# Altium PCB uChord Logic.PcbDoc (part 1 of 2)
Units mm, origin at the board's own origin, x right, y up, seen from the top; angles counter-clockwise.
Board outline 285 x 95.88 mm, 2 copper layers (Top Layer, Bottom Layer), stack 1.577 mm thick; 120 components, 85 nets, 515 pads, 29 vias.
Unrouted connection lines stored in the file: 54.
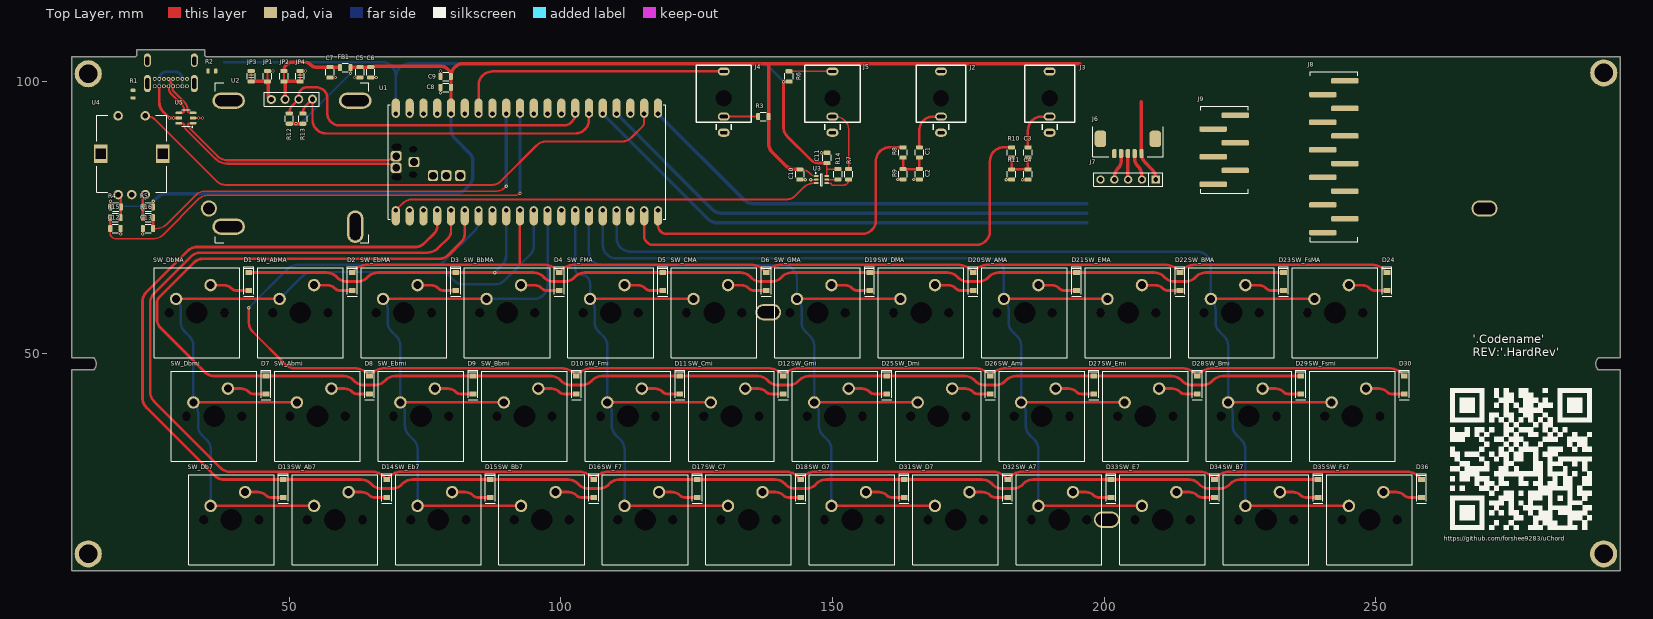
[diagram p0: Top Layer view]
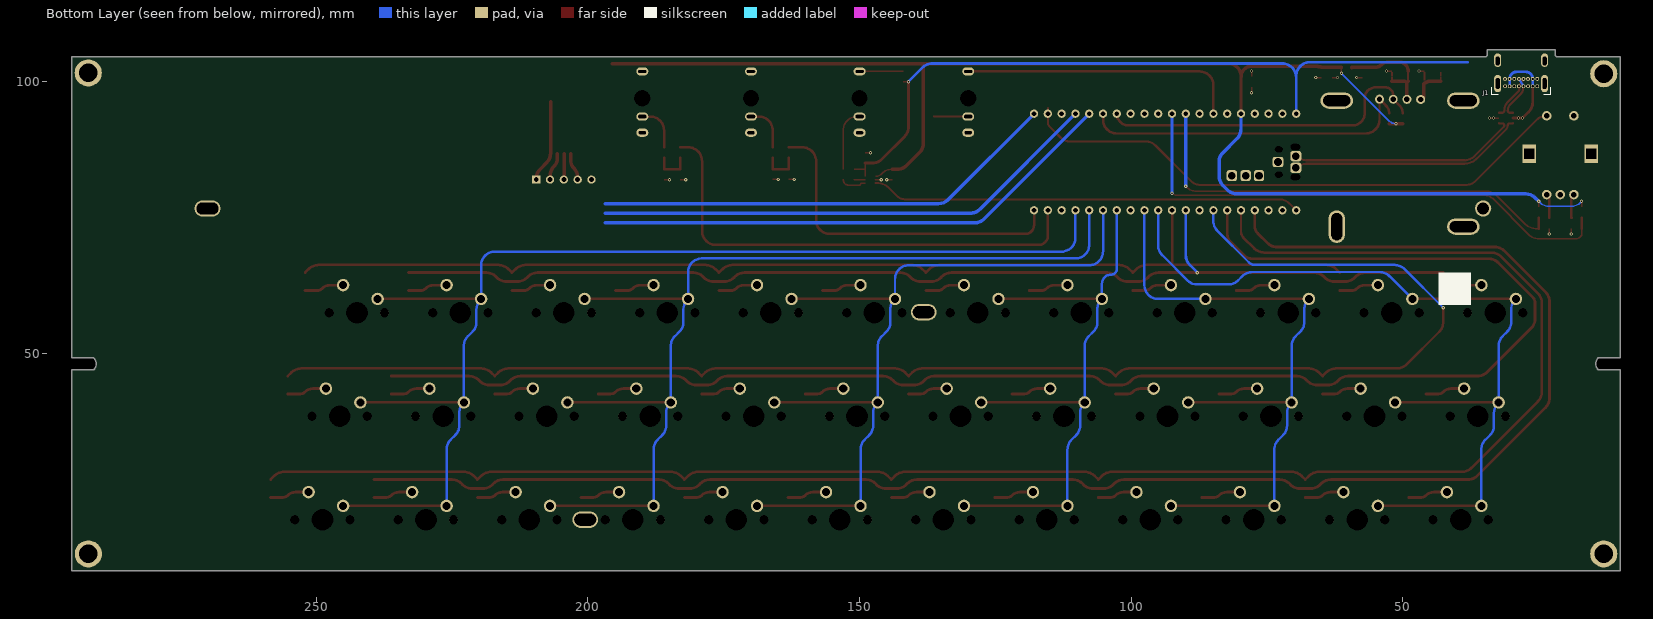
[diagram p1: Bottom Layer view, seen from below]
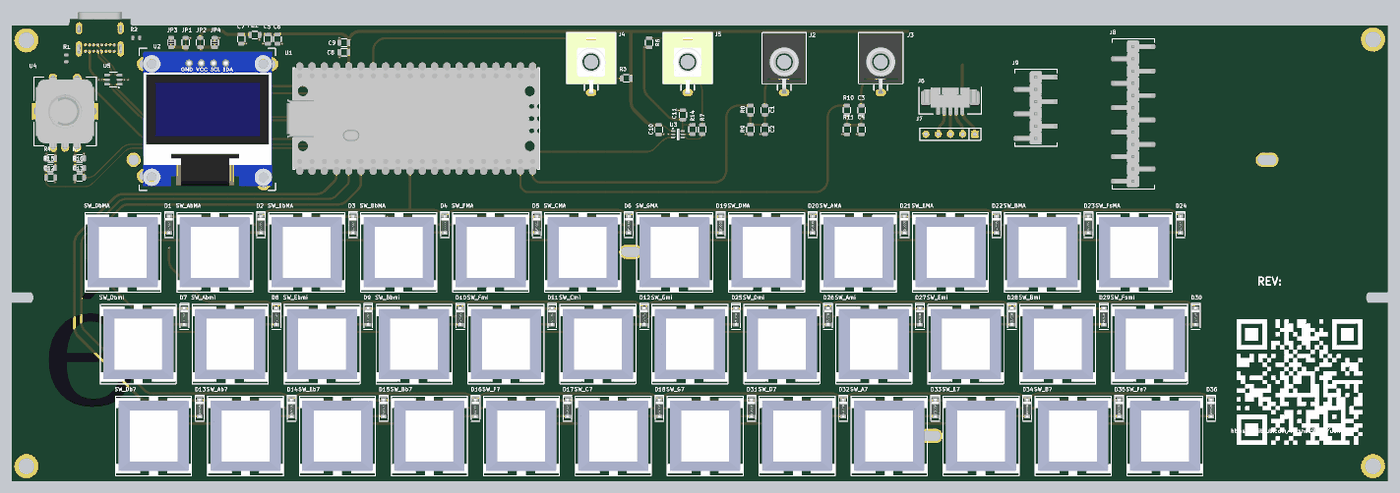
[diagram p2: 3D render of the assembled board from above, using the file's embedded part models]

## Layer stack, top to bottom
Top Solder: solder mask 0.0102, Solder Resist, Dk 3.5
Top Layer: signal copper 0.0356
Dielectric 1: dielectric 1.5059, FR-4, Dk 4.8
Bottom Layer: signal copper 0.0356
Bottom Solder: solder mask 0.0102, Solder Resist, Dk 3.5

## Board outline
10,47 14,47 ccw(c12.9,48.1) 14,49.2 10,49.2 10,104.6 21.669,104.6 21.918,104.849 21.918,105.875 34.482,105.875 34.482,104.849 34.731,104.6 294.988,104.6 295,104.588 295,49.188 291,49.188 ccw(c292.1,48.088) 291,46.988 295,46.988 295,10 10,10

## Design rules (kind name [scope] priority, off if disabled: settings)
Clearance [All] p1: gap=0.127 ignorepadtopadclearanceinfootprint=FALSE
DiffPairsRouting [All] p1: maxlimit=0.254 minlimit=0.254 mostfreqgap=0.254 toplayer_minwidth=0.381 toplayer_maxwidth=0.381 toplayer_prefwidth=0.381 bottomlayer_minwidth=0.381 bottomlayer_maxwidth=0.381 bottomlayer_prefwidth=0.381 maxuncoupledlength=12.7
Height [All] p1: minheight=0 maxheight=910.217 prefheight=0
HoleSize [All] p1: absolutevalues=TRUE maxlimit=2539.975 minlimit=0.025 maxpercent=80.000 minpercent=20.000
PolygonConnect [All] p1: connectstyle=Relief reliefconductorwidth=0.254 reliefentries=4 polygonreliefangle="90 Angle" airgapwidth=0.254
RoutingVias [All] p1: holewidth=0.711 width=1.27 viastyle="Through Hole" minholewidth=0.711 minwidth=1.27 maxholewidth=0.711 maxwidth=1.27
SolderMaskExpansion [All] p1: expansion=0.102 istentingtop=FALSE
Width [All] p1: maxlimit=7.62 minlimit=0.203 preferedwidth=0.254
27 further rules are at their usual default settings.

## Classes and differential pairs
differential pair class DIFF90: USB_D USB_D_CON
component class Matrix: D1 D2 D3 D4 D5 D6 D7 D8 D9 D10 D11 D12 D13 D14 D15 D16 D17 D18 D19 D20 D21 D22 D23 D24 D25 D26 D27 D28 D29 D30 D31 D32 D33 D34 D35 D36 SW_A7 SW_Ab7 SW_AbMA SW_Abmi SW_AMA SW_Ami SW_B7 SW_Bb7 SW_BbMA SW_Bbmi SW_BMA SW_Bmi SW_C7 SW_CMA SW_Cmi SW_D7 SW_Db7 SW_DbMA SW_Dbmi SW_DMA SW_Dmi SW_E7 SW_Eb7 SW_EbMA SW_Ebmi SW_EMA SW_Emi SW_F7 SW_FMA SW_Fmi SW_Fs7 SW_FsMA SW_Fsmi SW_G7 SW_GMA SW_Gmi
component class Logic: C1 C2 C3 C4 C5 C6 C7 C8 C9 C10 C11 C12 C13 FB1 J1 J2 J3 J4 J5 J6 J7 J8 J9 JP1 JP2 JP3 JP4 R1 R2 R3 R4 R5 R6 R7 R8 R9 R10 R11 R12 R13 R14 R15 R16 U1 U2 U3 U4 U5
differential pair USB_D_CON: +USB_D_CON_P -USB_D_CON_N
differential pair USB_D: +USB_D_P -USB_D_N

## Components (designator, comment, footprint, x,y, rotation, side; value= is the part's Value field where it differs from the comment)
C1 "10µF" Chip0805 166,87 r90 top
C2 "0.033µF" Chip0805 166,83 r90 top
C3 "10µF" Chip0805 186,87 r90 top
C4 "0.033µF" Chip0805 186,82.955 r90 top
C5 "10µF" Chip0805 63,101.75 r90 top
C6 "0.1µF" Chip0805 65,101.75 r90 top
C7 "0.1µF" Chip0805 57.5,101.75 r90 top
C8 "0.1µF" Chip0805 78.795,99 r0 top
C9 "10µF" Chip0805 78.795,101 r0 top
C10 "0.1µF" Chip0805 144,82.955 r90 top
C11 "0.1µF" Chip0805 149,86 r270 top
C12 "10000pF" Chip0805 18,73 r180 top
C13 "10000pF" Chip0805 24,73 r0 top
D1 "1N4148W-7-F" SOD-123 42.545,63.246 r270 top
D2 "1N4148W-7-F" SOD-123 61.595,63.246 r270 top
D3 "1N4148W-7-F" SOD-123 80.645,63.246 r270 top
D4 "1N4148W-7-F" SOD-123 99.695,63.246 r270 top
D5 "1N4148W-7-F" SOD-123 118.745,63.246 r270 top
D6 "1N4148W-7-F" SOD-123 137.795,63.246 r270 top
D7 "1N4148W-7-F" SOD-123 45.72,44.196 r270 top
D8 "1N4148W-7-F" SOD-123 64.77,44.196 r270 top
D9 "1N4148W-7-F" SOD-123 83.82,44.196 r270 top
D10 "1N4148W-7-F" SOD-123 102.87,44.196 r270 top
D11 "1N4148W-7-F" SOD-123 121.92,44.196 r270 top
D12 "1N4148W-7-F" SOD-123 140.97,44.196 r270 top
D13 "1N4148W-7-F" SOD-123 48.895,25.146 r270 top
D14 "1N4148W-7-F" SOD-123 67.945,25.146 r270 top
D15 "1N4148W-7-F" SOD-123 86.995,25.146 r270 top
D16 "1N4148W-7-F" SOD-123 106.045,25.146 r270 top
D17 "1N4148W-7-F" SOD-123 125.095,25.146 r270 top
D18 "1N4148W-7-F" SOD-123 144.145,25.146 r270 top
D19 "1N4148W-7-F" SOD-123 156.845,63.246 r270 top
D20 "1N4148W-7-F" SOD-123 175.895,63.246 r270 top
D21 "1N4148W-7-F" SOD-123 194.945,63.246 r270 top
D22 "1N4148W-7-F" SOD-123 213.995,63.246 r270 top
D23 "1N4148W-7-F" SOD-123 233.045,63.246 r270 top
D24 "1N4148W-7-F" SOD-123 252.095,63.246 r270 top
D25 "1N4148W-7-F" SOD-123 160.02,44.196 r270 top
D26 "1N4148W-7-F" SOD-123 179.07,44.196 r270 top
D27 "1N4148W-7-F" SOD-123 198.12,44.196 r270 top
D28 "1N4148W-7-F" SOD-123 217.17,44.196 r270 top
D29 "1N4148W-7-F" SOD-123 236.22,44.196 r270 top
D30 "1N4148W-7-F" SOD-123 255.27,44.196 r270 top
D31 "1N4148W-7-F" SOD-123 163.195,25.146 r270 top
D32 "1N4148W-7-F" SOD-123 182.245,25.146 r270 top
D33 "1N4148W-7-F" SOD-123 201.295,25.146 r270 top
D34 "1N4148W-7-F" SOD-123 220.345,25.146 r270 top
D35 "1N4148W-7-F" SOD-123 239.395,25.146 r270 top
D36 "1N4148W-7-F" SOD-123 258.445,25.146 r270 top
FB1 "FERRITE" Chip0805 60.325,102.616 r180 top
J1 "2137160001" MOLEX_2137160001 28.2,99.875 r0 bottom
J2 "WQP-WQP518MA" PJ301M-12 170,97 r0 top locked
J3 "WQP-WQP518MA" PJ301M-12 190,97 r0 top locked
J4 "WQP-WQP419GR" PJ366ST 130,97 r0 top locked
J5 "WQP-WQP419GR" PJ366ST 150,97 r0 top locked
J6 "0532610571" MOLEX_0532610571 204.394,89.512 r0 top
J7 "250010502" HEADER_1x5_100mil_NP 204.444,82.012 r180 top
J8 "GBC12SABN-M30" SULLINS_GBC12SABN-M30 242.316,86.233 r90 top
J9 "GBC06SABN-M30" SULLINS_GBC06SABN-M30 222.123,87.503 r90 top
JP1 "JUMMPER_NC_0805" JUMMPER_NC_0805 46,101.045 r270 top
JP2 "JUMMPER_NC_0805" JUMMPER_NC_0805 49,101.045 r270 top
JP3 "JUMMPER_NO_0805" JUMMPER_NO_0805 43,101.045 r270 top
JP4 "JUMMPER_NO_0805" JUMMPER_NO_0805 52,101.045 r270 top
R1 "5.1k" Chip0603 21.25,97.75 r270 top
R2 "5.1k" Chip0603 35.75,102 r180 top
R3 "220" Chip0805 137.287,93.599 r0 top
R4 "10k" Chip0805 18.045,77 r180 top
R5 "10k" Chip0805 24,77 r0 top
R6 "220" Chip0805 142,101 r270 top
R7 "220" Chip0805 153,83 r90 top
R8 "270" Chip0805 163,87 r270 top
R9 "150" Chip0805 163,83 r90 top
R10 "270" Chip0805 183,87 r270 top
R11 "150" Chip0805 183,82.955 r90 top
R12 "2.2k" Chip0805 50,93.25 r270 top
R13 "2.2k" Chip0805 52.5,93.25 r270 top
R14 "2.2k" Chip0805 151,83 r90 top
R15 "10k" Chip0805 17.955,75 r180 top
R16 "10k" Chip0805 24,75 r0 top
SW_A7 "MX1A-11NW" CHERRY_MX_FIX 191.738,19.4 r0 top
SW_Ab7 "MX1A-11NW" CHERRY_MX_FIX 58.388,19.4 r0 top
SW_AbMA "MX1A-11NW" CHERRY_MX_FIX 52.038,57.5 r0 top
SW_Abmi "MX1A-11NW" CHERRY_MX_FIX 55.213,38.45 r0 top
SW_AMA "MX1A-11NW" CHERRY_MX_FIX 185.388,57.5 r0 top
SW_Ami "MX1A-11NW" CHERRY_MX_FIX 188.563,38.45 r0 top
SW_B7 "MX1A-11NW" CHERRY_MX_FIX 229.838,19.4 r0 top
SW_Bb7 "MX1A-11NW" CHERRY_MX_FIX 96.488,19.4 r0 top
SW_BbMA "MX1A-11NW" CHERRY_MX_FIX 90.138,57.5 r0 top
SW_Bbmi "MX1A-11NW" CHERRY_MX_FIX 93.313,38.45 r0 top
SW_BMA "MX1A-11NW" CHERRY_MX_FIX 223.488,57.5 r0 top
SW_Bmi "MX1A-11NW" CHERRY_MX_FIX 226.663,38.45 r0 top
SW_C7 "MX1A-11NW" CHERRY_MX_FIX 134.588,19.4 r0 top
SW_CMA "MX1A-11NW" CHERRY_MX_FIX 128.238,57.5 r0 top
SW_Cmi "MX1A-11NW" CHERRY_MX_FIX 131.413,38.45 r0 top
SW_D7 "MX1A-11NW" CHERRY_MX_FIX 172.688,19.4 r0 top
SW_Db7 "MX1A-11NW" CHERRY_MX_FIX 39.338,19.4 r0 top
SW_DbMA "MX1A-11NW" CHERRY_MX_FIX 32.988,57.5 r0 top
SW_Dbmi "MX1A-11NW" CHERRY_MX_FIX 36.163,38.45 r0 top
SW_DMA "MX1A-11NW" CHERRY_MX_FIX 166.338,57.5 r0 top
SW_Dmi "MX1A-11NW" CHERRY_MX_FIX 169.513,38.45 r0 top
SW_E7 "MX1A-11NW" CHERRY_MX_FIX 210.788,19.4 r0 top
SW_Eb7 "MX1A-11NW" CHERRY_MX_FIX 77.438,19.4 r0 top
SW_EbMA "MX1A-11NW" CHERRY_MX_FIX 71.088,57.5 r0 top
SW_Ebmi "MX1A-11NW" CHERRY_MX_FIX 74.263,38.45 r0 top
SW_EMA "MX1A-11NW" CHERRY_MX_FIX 204.438,57.5 r0 top
SW_Emi "MX1A-11NW" CHERRY_MX_FIX 207.613,38.45 r0 top
SW_F7 "MX1A-11NW" CHERRY_MX_FIX 115.538,19.4 r0 top
SW_FMA "MX1A-11NW" CHERRY_MX_FIX 109.188,57.5 r0 top
SW_Fmi "MX1A-11NW" CHERRY_MX_FIX 112.363,38.45 r0 top
SW_Fs7 "MX1A-11NW" CHERRY_MX_FIX 248.888,19.4 r0 top
SW_FsMA "MX1A-11NW" CHERRY_MX_FIX 242.538,57.5 r0 top
SW_Fsmi "MX1A-11NW" CHERRY_MX_FIX 245.713,38.45 r0 top
SW_G7 "MX1A-11NW" CHERRY_MX_FIX 153.638,19.4 r0 top
SW_GMA "MX1A-11NW" CHERRY_MX_FIX 147.288,57.5 r0 top
SW_Gmi "MX1A-11NW" CHERRY_MX_FIX 150.463,38.45 r0 top
U1 "Raspberry Pi Pico" RASPBERRY_PI_PICO 93.75,85.25 r90 top
U2 "0.96\" OLED MODULE" OLEDp96MOD_BOARD_MOUNT 50.5,86.75 r0 top locked
U3 "TXU0101DCKR" 6-TSSOP 148,82 r0 top
U4 "PEC11R-4020F-S0012" BOURNS_PEC11R-4020F-S 21,86.75 r0 top
U5 "IP4234CZ6,115" 6-TSOP 30.988,93.345 r180 top

## Footprints (in the part's own frame and the unit in brackets; to place one, negate y for a bottom-side part, rotate by r counter-clockwise, add the part's x,y. Pads: shape width x height; smd on the part's side, far side on the other; paste and mask are expansions set on the pad)
6-TSOP [mm] "TSOP, 6-Leads, Body 2.90x1.50mm, Pitch 0.95mm, IPC Medium Density"
  rrect50% 1.2x0.5 smd: 1(-1.3,0.95) 2(-1.3,0) 3(-1.3,-0.95) 4(1.3,-0.95) 5(1.3,0) 6(1.3,0.95)
  silkscreen extent -1.24,-1.55 0.76,1.75, body extent -0.85,-1.55 0.85,1.55, height 1.1
6-TSSOP [mm] "SOT23, 6-Leads, Body 2.00x2.10mm, Pitch 0.65mm, IPC Medium Density"
  rrect50% 0.85x0.35 smd: 1(-0.95,0.65) 2(-0.95,0) 3(-0.95,-0.65) 4(0.95,-0.65) 5(0.95,0) 6(0.95,0.65)
  silkscreen extent -1.17,-1.1 0.15,1.32, body extent -0.67,-1.1 0.67,1.1, height 1.1
BOURNS_PEC11R-4020F-S [mm]
  round 1.75 hole 1: 1(-2.5,7) 2(2.5,7) A(-2.5,-7.5) B(2.5,-7.5) C(0,-7.5)
  rect 2.5x3.4 hole 1.8 square: 3(-5.7,0) 4(5.7,0)
  silkscreen extent -6.48,-7.11 6.48,7.11, body extent -7,-7.7 7,7.2, height 26.62
CHERRY_MX_FIX [mil]
  round 60 hole 67: 0(-200,0) 0(200,0)
  round 60 hole 157: 0(0,0)
  round 90 hole 59: 1(-150,100) 2(100,200)
  silkscreen extent -310,-325 310,325, body extent -308,-321 308,321, height 616
Chip0603 [mm] "Chip Resistor, 2-Leads, Body 1.57x0.85mm, IPC Medium Density"
  rrect50% 0.6x0.9 smd: 1(-0.7,0) 2(0.7,0)
  body extent -0.75,-0.38 0.75,0.37, height 0.5
Chip0805 [mm] "Chip Resistor, 2-Leads, Body 2.05x1.25mm, IPC Medium Density"
  rrect50% 0.75x1.3 smd: 1(-0.955,0) 2(0.955,0)
  silkscreen extent -0.55,-0.77 0.55,0.77, body extent -0.95,-0.55 0.95,0.55, height 0.5
HEADER_1x5_100mil_NP [mil]
  rect 60x60 hole 35: 1(-200,0)
  round 60 hole 35: 2(-100,0) 3(0,0) 4(100,0) 5(200,0)
  silkscreen extent -250,-50 250,50
JUMMPER_NC_0805 [mm]
  rrect50% 0.75x1.3 smd: 1(-0.955,0) 2(0.955,0)
  Top Layer region: -0.762,-0.127 -0.762,0.127 0.762,0.127 0.762,-0.127
  silkscreen extent -0.55,-0.77 0.55,0.77
JUMMPER_NO_0805 [mm]
  rrect50% 0.75x1.3 smd: 1(-0.955,0) 2(0.955,0)
  rect 0.254x1.016 smd: 1(-0.229,0) 2(0.229,0)
  Top Layer region: -0.128,-0.126 -0.128,0.128 -0.763,0.128 -0.763,-0.126
  Top Layer region: 0.127,-0.127 0.127,0.127 0.762,0.127 0.762,-0.127
  silkscreen extent -0.55,-0.77 0.55,0.77
MOLEX_0532610571 [mm]
  rrect50% 2.1x3 smd: 0(-5.05,0) 0(5.05,0)
  rrect50% 0.8x1.6 smd: 1(2.5,-2.7) 2(1.25,-2.7) 3(0,-2.7) 4(-1.25,-2.7) 5(-2.5,-2.7)
  silkscreen extent -6.48,-3.33 6.48,2.25, body extent -5.7,-2.95 5.7,2.25, height 3.4
MOLEX_2137160001 [mm]
  oval 1.3x3.2 hole 0.7 slot 2 at 90 deg: 1(-4.32,0.175) 2(4.32,0.175)
  oval 1.3x2.5 hole 0.7 slot 1.6 at 90 deg copper offset 0,-0.15: 3(-4.32,-3.975) 4(4.32,-3.975)
  round 0.7 hole 0.4: A1(-2.97,0.675) A4(-2.12,0.675) A5(-1.27,0.675) A6(-0.42,0.675) A7(0.42,0.675) A8(1.27,0.675) A9(2.12,0.675) A12(2.97,0.675) B1(2.97,-0.675) B4(2.12,-0.675) B5(1.27,-0.675) B6(0.42,-0.675) B7(-0.42,-0.675) B8(-1.27,-0.675) B9(-2.12,-0.675) B12(-2.97,-0.675)
  silkscreen extent -5.46,0.89 5.46,2.29, body extent -4.82,-7.39 4.82,1.58, height 3.37
OLEDp96MOD_BOARD_MOUNT [mm]
  round 1.651 hole 0.991: 1(-3.795,10.015) 2(-1.27,10.033) 3(1.255,10.051) 4(3.779,10.068)
  oval 6x3 hole 2 slot 5 at 0 deg: 5(-11.65,9.8) 6(11.65,9.8) 7(-11.65,-13.4)
  oval 3x6 hole 2 slot 5 at 90 deg: 8(11.65,-13.4)
  silkscreen extent -14.1,-16.38 14.1,13.08, body extent -13.34,-15.48 13.36,12.38, height 9.21
PJ301M-12 [mm] "Moddeled after QingPu WQP-WQP518MA"
  round 0.025 hole 3 unplated: 0(0,0)
  oval 2.2x1.5 hole 0.6 slot 1.3 at 0 deg: 1(0,-6.35)
  oval 2.2x1.5 hole 0.6 slot 1.5 at 0 deg: 2(0,-3.38)
  oval 2.2x1.5 hole 0.5 slot 1.5 at 0 deg: 3(0,4.92)
  silkscreen extent -4.57,-5.84 4.57,6.1, body extent -4.5,-6.62 4.5,6.01, height 14.52
PJ366ST [mm] "Moddeled after QingPu WQP-WQP419GR"
  round 0.025 hole 3 unplated: 0(0,0)
  oval 2.2x1.5 hole 0.6 slot 1.3 at 0 deg: 1(0,-6.35)
  oval 2.2x1.5 hole 0.6 slot 1.5 at 0 deg: 2(0,-3.38)
  oval 2.2x1.5 hole 0.5 slot 1.5 at 0 deg: 3(0,4.92)
  silkscreen extent -5.08,-5.84 5.08,6.1, body extent -5,-6.73 5,6, height 15.52
RASPBERRY_PI_PICO [mil]
  round 5 hole 43.31 slot 70.87 at 90 deg unplated: 0(-108.9,943.82) 0(108.9,943.82)
  round 5 hole 41.34 slot 57.09 at 90 deg unplated: 0(-92.09,824.53) 0(92.09,824.53)
  oval 140x60 smd: 1(-390,950) 2(-390,850) 3(-390,750) 4(-390,650) 5(-390,550) 6(-390,450) 7(-390,350) 8(-390,250) 9(-390,150) 10(-390,50) 11(-390,-50) 12(-390,-150) 13(-390,-250) 14(-390,-350) 15(-390,-450) 16(-390,-550) 17(-390,-650) 18(-390,-750) 19(-390,-850) 20(-390,-950) 21(390,-950) 22(390,-850) 23(390,-750) 24(390,-650) 25(390,-550) 26(390,-450) 27(390,-350) 28(390,-250) 29(390,-150) 30(390,-50) 31(390,50) 32(390,150) 33(390,250) 34(390,350) 35(390,450) 36(390,550) 37(390,650) 38(390,750) 39(390,850) 40(390,950)
  round 60 hole 35: 1(-350,950) 2(-350,850) 3(-350,750) 4(-350,650) 5(-350,550) 6(-350,450) 7(-350,350) 8(-350,250) 9(-350,150) 10(-350,50) 11(-350,-50) 12(-350,-150) 13(-350,-250) 14(-350,-350) 15(-350,-450) 16(-350,-550) 17(-350,-650) 18(-350,-750) 19(-350,-850) 20(-350,-950) 21(350,-950) 22(350,-850) 23(350,-750) 24(350,-650) 25(350,-550) 26(350,-450) 27(350,-350) 28(350,-250) 29(350,-150) 30(350,-50) 31(350,50) 32(350,150) 33(350,250) 34(350,350) 35(350,450) 36(350,550) 37(350,650) 38(350,750) 39(350,850) 40(350,950)
  rrect50% 75x80 hole 55: TP1(0,818.11) TP2(42.5,948.03) TP3(-42.5,948.03)
  rrect50% 80x75 hole 55: TP4(-98.43,680.32) TP5(-98.43,583.46) TP6(-98.43,483.46)
  silkscreen extent -415,-1005 415,1005, body extent -413,-1005 413,1054, height 147
SOD-123 [mm] "SOD123"
  rect 0.91x1.22 smd: 1(-1.64,0) 2(1.64,0)
  silkscreen extent -2.7,-0.9 2.7,0.9, body extent -1.92,-0.85 1.93,0.85, height 1.43
SULLINS_GBC06SABN-M30 [mil]
  rrect50% 40x200 smd: 1(-250,80) 2(-150,-80) 3(-50,80) 4(50,-80) 5(150,80) 6(250,-80)
  silkscreen extent -315,-175 315,170, body extent -300,-160 300,160, height 390
SULLINS_GBC12SABN-M30 [mil]
  rrect50% 40x200 smd: 1(-550,80) 2(-450,-80) 3(-350,80) 4(-250,-80) 5(-150,80) 6(-50,-80) 7(50,80) 8(150,-80) 9(250,80) 10(350,-80) 11(450,80) 12(550,-80)
  silkscreen extent -615,-175 615,170, body extent -600,-158 600,162, height 390

## Part data
C1 C3 C5 C9: library part C2012X5R1C106K125AC, "CAP CER 10UF 16V 10% X5R 0805", Manufacturer="TDK Corporation", Operating Temperature="-55°C ~ 85°C", Package / Case="0805 (2012 Metric)", Ratings=-, Supplier Part Number 1=445-7646-1-ND, Temperature Coefficient=X5R, Tolerance=±10%, Voltage=16V, Applications="General Purpose", Capacitance=10µF, Features=-, Height - Seated (Max)=-, HelpURL=http://product.tdk.com/capacitor/mlcc/en/documents/mlcc_commercial_general_en.pdf, Lead Spacing=-, Lead Style=-, Manufacturer Part Number=C2012X5R1C106K125AC, Mounting Type="Surface Mount, MLCC", PartNumber=C2012X5R1C106K125AC, Series=C, Size / Dimension="0.079\" L x 0.049\" W (2.00mm x 1.25mm)", Supplier 1=Digi-Key, Supplier 2=Mouser, Thickness (Max)="0.057\" (1.45mm)"
C2 C4: library part C2012C0G1H333J125AA, "CAP CER 0.033UF 50V 5% NP0 0805", Manufacturer="TDK Corporation", Operating Temperature="-55°C ~ 125°C", Package / Case="0805 (2012 Metric)", Ratings=-, Supplier Part Number 1=445-7523-1-ND, Temperature Coefficient="C0G, NP0", Tolerance=±5%, Voltage=50V, Applications="General Purpose", Capacitance=0.033µF, Features=-, Height - Seated (Max)=-, HelpURL=http://product.tdk.com/capacitor/mlcc/en/documents/mlcc_commercial_general_en.pdf, Lead Spacing=-, Lead Style=-, Manufacturer Part Number=C2012C0G1H333J125AA, Mounting Type="Surface Mount, MLCC", PartNumber=C2012C0G1H333J125AA, Series=C, Size / Dimension="0.079\" L x 0.049\" W (2.00mm x 1.25mm)", Supplier 1=Digi-Key, Supplier 2=Mouser, Thickness (Max)="0.057\" (1.45mm)"
C6 C7 C8 C10 C11: library part C2012X7T2E104K125AA, "CAP CER 0.1UF 250V 10% X7T 0805", Manufacturer="TDK Corporation", Operating Temperature="-55°C ~ 125°C", Package / Case="0805 (2012 Metric)", Ratings=-, Supplier Part Number 1=445-7749-1-ND, Temperature Coefficient=X7T, Tolerance=±10%, Voltage=250V, Applications="General Purpose", Capacitance=0.1µF, Features=-, Height - Seated (Max)=-, HelpURL=http://product.tdk.com/capacitor/mlcc/en/documents/mlcc_commercial_midvoltage_en.pdf, Lead Spacing=-, Lead Style=-, Manufacturer Part Number=C2012X7T2E104K125AA, Mounting Type="Surface Mount, MLCC", PartNumber=C2012X7T2E104K125AA, Series=C, Size / Dimension="0.079\" L x 0.049\" W (2.00mm x 1.25mm)", Supplier 1=Digi-Key, Supplier 2=Mouser, Thickness (Max)="0.057\" (1.45mm)"
C12 C13: library part C2012X7R2E103M125AE, "CAP CER 10000PF 250V X7R 0805", Manufacturer="TDK Corporation", Operating Temperature="-55°C ~ 125°C", Package / Case="0805 (2012 Metric)", Ratings=-, Supplier Part Number 1=445-6805-1-ND, Temperature Coefficient=X7R, Tolerance=±20%, Voltage=250V, Applications="Boardflex Sensitive", Capacitance=10000pF, Features="Soft Termination", Height - Seated (Max)=-, HelpURL=http://product.tdk.com/capacitor/mlcc/en/documents/mlcc_commercial_soft_en.pdf, Lead Spacing=-, Lead Style=-, Manufacturer Part Number=C2012X7R2E103M125AE, Mounting Type="Surface Mount, MLCC", PartNumber=C2012X7R2E103M125AE, Series=C, Size / Dimension="0.079\" L x 0.049\" W (2.00mm x 1.25mm)", Supplier 1=Digi-Key, Supplier 2=Mouser, Thickness (Max)="0.057\" (1.45mm)"
D1 D2 D3 D4 D5 D6 D7 D8 D9 D10 D11 D12 D13 D14 D15 D16 D17 D18 D19 D20 D21 D22 D23 D24 D25 D26 D27 D28 D29 D30 D31 D32 D33 D34 D35 D36: "DIODE SWITCH 100V 0.15A SOD123", Capacitance @ Vr, F="2pF @ 0V, 1MHz", Current - Average Rectified (Io)=150mA, Current - Reverse Leakage @ Vr="1µA @ 75V", Manufacturer="Diodes Incorporated", Operating Temperature - Junction="-65°C ~ 150°C", Package / Case=SOD-123, Supplier Part Number 1=1N4148W-FDICT-ND, Voltage - DC Reverse (Vr) (Max)=100V, Voltage - Forward (Vf) (Max) @ If="1.25V @ 150mA", Datasheets=http://www.diodes.com/datasheets/ds30086.pdf, Diode Type=Standard, Manufacturer Part Number=1N4148W-7-F, Mounting Type="Surface Mount", PartNumber=1N4148W-7-F, Reverse Recovery Time (trr)=4ns, Series=0, Speed="Small Signal =< 200mA (Io), Any Speed", Supplier 1=Digi-Key, Supplier Device Package=SOD-123
FB1: library part 74279205, "FERRITE BEAD 1000 OHM .20A 0805", Current Rating=200mA, DC Resistance (DCR)="450 mOhm Max", Impedance @ Frequency="1 kOhm @ 100MHz", Manufacturer="Wurth Electronics Inc", Package / Case="0805 (2012 Metric)", Supplier Part Number 1=732-1606-1-ND, Filter Type="Differential Mode - Single", Height (Max)="0.043\" (1.10mm)", HelpURL=http://katalog.we-online.de/pbs/datasheet/74279205.pdf, Manufacturer Part Number=74279205, Mounting Type="Surface Mount", PartNumber=74279205, Series=WE-CBF, Size / Dimension="0.079\" L x 0.047\" W (2.00mm x 1.20mm)", Supplier 1=Digi-Key
J1: "CONN RCPT USB2.0 TYPE C 24POS RA", Manufacturer="Molex, LLC", Supplier Part Number 1=900-2137160001CT-ND, HelpURL=https://www.molex.com/pdm_docs/sd/2137160001_sd.pdf, Manufacturer Part Number=2137160001, PartNumber=2137160001, Supplier 1=Digi-Key, Supplier 2=Mouser, Supplier Part Number 2=538-213716-0001
J2 J3: "CONN 3.5mm VIRTICAL MONO w/ NORMAL", Manufacturer=QingPu, Connector Type="Phone Jack", Gender=Female, HelpURL=http://www.qingpu-electronics.com/en/products/WQP-PJ398SM-362.html, Manufacturer Part Number=WQP-WQP518MA, PartNumber=WQP-WQP518MA, Signal Lines=Mono, Supplier 1=QingPu, Supplier Part Number 1=WQP-WQP518MA
J4 J5: "CONN 3.5mm VIRTICAL STEREO", Manufacturer=QingPu, Connector Type="Phone Jack", Gender=Female, HelpURL=http://www.qingpu-electronics.com/en/products/WQP-PJ366ST-364.html, Manufacturer Part Number=WQP-WQP419GR, PartNumber=WQP-WQP419GR, Signal Lines=Stereo, Supplier 1=QingPu, Supplier Part Number 1=WQP-WQP419GR
J6: "CONN HEADER SMD R/A 5POS 1.25MM", Manufacturer=Molex, Manufacturer Part Number=WM7623CT-ND, HelpURL=https://www.molex.com/pdm_docs/sd/532610571_sd.pdf, PartNumber=0532610571, Supplier 1=Digi-Key, Supplier 2=Mouser
J7: "CABLE 5POS .100 JUMPER 2 INCHES", Manufacturer="Molex Inc", Supplier Part Number 1=WM05-02A-ND, Cable Type=Ribbon, Datasheets=http://www.molex.com/pdm_docs/sd/250010502_sd.pdf, Length="2.00\" (50.80mm)", Length - Exposed Ends="0.125\" (3.18mm)", Manufacturer Part Number=250010502, Number of Conductors=5, PartNumber=250010502, Pitch="0.100\" (2.54mm)", Series=25001, Supplier 1=Digi-Key, Supplier 2=Mouser, Supplier Part Number 2=538-25001-0502, Termination Style="Completely Exposed Wires on Both Sides with Protective Tab"
J8: "CONN HEADER SMD 12POS 2.54MM", Manufacturer="Sullins Connector Solutions", Supplier Part Number 1=S1033E-12-ND, HelpURL=https://s3.amazonaws.com/catalogspreads-pdf/PAGE112-113%20.100%20MALE%20HDR.pdf, Manufacturer Part Number=GBC12SABN-M30, PartNumber=GBC12SABN-M30, Supplier 1=Digi-Key, Supplier 2=Mouser
J9: "CONN HEADER SMD 6POS 2.54MM", Manufacturer="Sullins Connector Solutions", Supplier Part Number 1=S1033E-06-ND, HelpURL=https://s3.amazonaws.com/catalogspreads-pdf/PAGE112-113%20.100%20MALE%20HDR.pdf, Manufacturer Part Number=GBC06SABN-M30, PartNumber=GBC06SABN-M30, Supplier 1=Digi-Key, Supplier 2=Mouser
R1 R2: library part CRCW06035K10FKEA, "RES 5.10K OHM 1/10W 1% 0603 SMD", Manufacturer="Vishay Dale", Package / Case="0603 (1608 Metric)", Power (Watts)="0.1W, 1/10W", Supplier Part Number 1=541-5.10KHCT-ND, Temperature Coefficient=±100ppm/°C, Tolerance=±1%, Composition="Thick Film", Features="Automotive AEC-Q200 Qualified", Height="0.020\" (0.50mm)", HelpURL=http://www.vishay.com/doc?20035, Manufacturer Part Number=CRCW06035K10FKEA, Number of Terminations=2, PartNumber=CRCW06035K10FKEA, Resistance=5.1k, Series=CRCW, Size / Dimension="0.061\" L x 0.033\" W (1.55mm x 0.85mm)", Supplier 1=Digi-Key, Supplier 2=Mouser, Supplier Device Package="0603 (1608 Metric)", Supplier Part Number 2=71-CRCW0603-5.1K-E3
R3 R6 R7: library part CRCW0805220RFKEA, "RES 220 OHM 1/8W 1% 0805 SMD", Manufacturer="Vishay Dale", Package / Case="0805 (2012 Metric)", Power (Watts)="0.125W, 1/8W", Supplier Part Number 1=541-220CCT-ND, Temperature Coefficient=±100ppm/°C, Tolerance=±1%, Composition="Thick Film", Features="Automotive AEC-Q200 Qualified", Height="0.020\" (0.50mm)", HelpURL=http://www.vishay.com/doc?20035, Manufacturer Part Number=CRCW0805220RFKEA, Number of Terminations=2, PartNumber=CRCW0805220RFKEA, Resistance=220, Series=CRCW, Size / Dimension="0.079\" L x 0.049\" W (2.00mm x 1.25mm)", Supplier 1=Digi-Key, Supplier 2=Mouser, Supplier Device Package="0805 (2012 Metric)"
R4 R5 R15 R16: library part CRCW080510K0FKEA, "RES 10.0K OHM 1/8W 1% 0805 SMD", Manufacturer="Vishay Dale", Package / Case="0805 (2012 Metric)", Power (Watts)="0.125W, 1/8W", Supplier Part Number 1=541-10.0KCCT-ND, Temperature Coefficient=±100ppm/°C, Tolerance=±1%, Composition="Thick Film", Features="Automotive AEC-Q200 Qualified", Height="0.020\" (0.50mm)", HelpURL=http://www.vishay.com/doc?20035, Manufacturer Part Number=CRCW080510K0FKEA, Number of Terminations=2, PartNumber=CRCW080510K0FKEA, Resistance=10k, Series=CRCW, Size / Dimension="0.079\" L x 0.049\" W (2.00mm x 1.25mm)", Supplier 1=Digi-Key, Supplier 2=Mouser, Supplier Device Package="0805 (2012 Metric)"
R8 R10: library part CRCW0805270RFKEA, "RES 270 OHM 1/8W 1% 0805 SMD", Manufacturer="Vishay Dale", Package / Case="0805 (2012 Metric)", Power (Watts)="0.125W, 1/8W", Supplier Part Number 1=541-270CCT-ND, Temperature Coefficient=±100ppm/°C, Tolerance=±1%, Composition="Thick Film", Features="Automotive AEC-Q200 Qualified", Height="0.020\" (0.50mm)", HelpURL=http://www.vishay.com/doc?20035, Manufacturer Part Number=CRCW0805270RFKEA, Number of Terminations=2, PartNumber=CRCW0805270RFKEA, Resistance=270, Series=CRCW, Size / Dimension="0.079\" L x 0.049\" W (2.00mm x 1.25mm)", Supplier 1=Digi-Key, Supplier 2=Mouser, Supplier Device Package="0805 (2012 Metric)"
R9 R11: library part CRCW0805150RFKEA, "RES 150 OHM 1/8W 1% 0805 SMD", Manufacturer="Vishay Dale", Package / Case="0805 (2012 Metric)", Power (Watts)="0.125W, 1/8W", Supplier Part Number 1=541-150CCT-ND, Temperature Coefficient=±100ppm/°C, Tolerance=±1%, Composition="Thick Film", Features="Automotive AEC-Q200 Qualified", Height="0.020\" (0.50mm)", HelpURL=http://www.vishay.com/doc?20035, Manufacturer Part Number=CRCW0805150RFKEA, Number of Terminations=2, PartNumber=CRCW0805150RFKEA, Resistance=150, Series=CRCW, Size / Dimension="0.079\" L x 0.049\" W (2.00mm x 1.25mm)", Supplier 1=Digi-Key, Supplier 2=Mouser, Supplier Device Package="0805 (2012 Metric)"
R12 R13 R14: library part CRCW08052K20FKEA, "RES 2.20K OHM 1/8W 1% 0805 SMD", Manufacturer="Vishay Dale", Package / Case="0805 (2012 Metric)", Power (Watts)="0.125W, 1/8W", Supplier Part Number 1=541-2.20KCCT-ND, Temperature Coefficient=±100ppm/°C, Tolerance=±1%, Composition="Thick Film", Features="Automotive AEC-Q200 Qualified", Height="0.020\" (0.50mm)", HelpURL=http://www.vishay.com/doc?20035, Manufacturer Part Number=CRCW08052K20FKEA, Number of Terminations=2, PartNumber=CRCW08052K20FKEA, Resistance=2.2k, Series=CRCW, Size / Dimension="0.079\" L x 0.049\" W (2.00mm x 1.25mm)", Supplier 1=Digi-Key, Supplier 2=Mouser, Supplier Device Package="0805 (2012 Metric)"
SW_A7 SW_Ab7 SW_AbMA SW_Abmi SW_AMA SW_Ami SW_B7 SW_Bb7 SW_BbMA SW_Bbmi SW_BMA SW_Bmi SW_C7 SW_CMA SW_Cmi SW_D7 SW_Db7 SW_DbMA SW_Dbmi SW_DMA SW_Dmi SW_E7 SW_Eb7 SW_EbMA SW_Ebmi SW_EMA SW_Emi SW_F7 SW_FMA SW_Fmi SW_Fs7 SW_FsMA SW_Fsmi SW_G7 SW_GMA SW_Gmi: "SWITCH PUSH SPST-NO 0.01A 12V", Manufacturer="Cherry Americas LLC", Supplier Part Number 1=CH160-ND, HelpURL=https://media.digikey.com/pdf/Data%20Sheets/Cherry%20PDFs/MX%20Series.pdf, Manufacturer Part Number=MX1A-11NW, PartNumber=MX1A-11NW, Supplier 1=Digi-Key, Supplier 2=Mouser, Supplier Part Number 2=540-MX1A-11NW
U1: "RASPBERRY PI PICO RP2040 BOARD", Manufacturer="Raspberry Pi", Manufacturer Part Number=SC0915, Supplier Part Number 1=2648-SC0915CT-ND, PartNumber="Raspberry Pi Pico", Supplier 1=Digi-Key
U2: "0.96\" I2C OLED MODULE", PartNumber="0.96\" OLED MODULE"
U3: "SINGLE CHANNEL FIXED-DIRECTION L", Manufacturer="Texas Instruments", Supplier Part Number 1=296-TXU0101DCKRCT-ND, HelpURL=https://www.ti.com/lit/ds/symlink/txu0101.pdf, Manufacturer Part Number=TXU0101DCKR, PartNumber=TXU0101DCKR, Supplier 1=Digi-Key, Supplier 2=Mouser, Supplier Part Number 2=595-TXU0101DCKR
U4: "ROTARY ENCODER MECHANICAL 12PPR", Manufacturer="Bourns Inc.", Supplier Part Number 1=PEC11R-4020F-S0012-ND, Datasheets=https://www.bourns.com/docs/Product-Datasheets/PEC11R.pdf, Manufacturer Part Number=PEC11R-4020F-S0012, PartNumber=PEC11R-4020F-S0012, Supplier 1=Digi-Key, Supplier 2=Mouser, Supplier Part Number 2=652-PEC11R-4020F-S12
U5: "TVS DIODE 5.5VWM 6TSOP", Manufacturer="Nexperia USA Inc.", Supplier Part Number 1=1727-1217-1-ND, HelpURL=https://assets.nexperia.com/documents/data-sheet/IP4234CZ6.pdf, Manufacturer Part Number=IP4234CZ6,115, PartNumber=IP4234CZ6,115, Supplier 1=Digi-Key, Supplier 2=Mouser, Supplier Part Number 2=771-IP4234CZ6
JP1 JP2: Manufacturer Part Number=JUMMPER_NC_0805, PartNumber=JUMMPER_NC_0805
JP3 JP4: Manufacturer Part Number=JUMMPER_NO_0805, PartNumber=JUMMPER_NO_0805

## Free pads (board coordinates)
  round 5 hole 3.4: 0(13,13.1) 0(13,101.5) 0(291.988,13.1) 0(292,101.65)
  round 3 hole 2.2: 0(35.2,76.7)
  oval 4.75x3 hole 2.2 slot 4 at 0 deg: 0(138.2,57.6) 0(200.5,19.4) 0(270.05,76.688)

## Via types
v1: diameter 0.61, hole 0.305, Top Layer to Bottom Layer, tented both sides, 29 vias

## Nets (pads, with @x,y where several pads share a name; then routed paths per layer and width w, separated by ;. In a path a pad name is that pad's centre, name@x,y a point inside that pad or via, vN(x,y) a via of type N, cw(c..) or ccw(c..) an arc to the next point about the centre after c; other vN are vias at no path point)
3.3V: C5.2 C6.2 C8.2 C9.2 C10.2 FB1.1 J6.1 J7.1 R3.2 R4.2 R5.2 R12.2 R13.2 U1.36 U3.1 | length 286.9
  Top Layer w0.254: R4.2 v1(17.09,78) ; R5.2 v1(24.955,78) ; v1(61.28,101.616) FB1.1 ; C10.2 144.038,83.91 cw(c144.038,81.37) 145.834,83.166 146,83 ccw(c146.845,83.845) 146.845,82.65 U3.1
  Top Layer w0.635: R12.2 v1(51.25,92.295) R13.2 ; FB1.1 cw(c61.369,102.616) 61.369,102.705 C5.2 C6.2 65.058,102.762 65.524,102.762 65.631,102.87 77.88,102.87 cw(c77.88,101) C9.2 ; U1.36@79.78,94.14 79.78,95.156 79.78,100.928 ccw(c79.678,100.928) C9.2 ; C10.2 143.075,83.91 cw(c143.075,86.45) 141.279,84.654 138.986,86.947 cw(c140.782,88.743) 138.242,88.743 R3.2 138.242,103.231 cw(c138.45,103.231) 138.303,103.378 ; 195.58,103.378 138.303,103.378 ; 206.894,96.393 J6.1 ccw(c209.238,86.812) 207.581,85.154 208.788,83.947 cw(c207.011,82.17) 209.524,82.17 J7.1 ; C9.2 cw(c82.128,101) 82.128,103.378 138.303,103.378
  Bottom Layer w0.254: v1(17.09,78) 17.257,77.833 ccw(c19.053,79.629) 19.053,77.089 22.992,77.089 ccw(c22.992,79.629) 24.788,77.833 v1(24.955,78) ; v1(51.25,92.295) ccw(c51.25,94.007) 52.46,92.796 v1(61.28,101.616)
  Bottom Layer w0.635: v1(24.955,78) 25.586,78.631 cw(c27.382,76.835) 27.382,79.375 80.482,79.375 ccw(c80.482,81.915) 82.278,80.119 83.076,80.917 ccw(c81.28,82.713) 83.82,82.713 83.82,85.344 ccw(c81.674,85.344) 83.191,86.862 80.524,89.529 cw(c82.32,91.325) 79.78,91.325 U1.36@79.78,94.14
ADC2: J4.3 U1.34 | length 51.8
  Top Layer w0.457: U1.34@84.86,94.14 84.86,95.156 84.86,99.38 cw(c87.4,99.38) 87.4,101.92 J4.3
ADC_VREF: U1.35
AUDIO_CHORD: R10.1 U1.19 | length 88.1
  Top Layer w0.457: U1.19@115.34,75.344 115.34,71.66 ccw(c117,71.66) 117,70 176.46,70 ccw(c176.46,72.54) 179,72.54 179,85.415 cw(c181.54,85.415) 181.54,87.955 R10.1
AUDIO_STRUM: R8.1 U1.20 | length 61.5
  Top Layer w0.457: U1.20@117.88,75.344 117.88,73.62 ccw(c119.5,73.62) 119.5,72 155.46,72 ccw(c155.46,74.54) 158,74.54 158,85.415 cw(c160.54,85.415) 160.54,87.955 R8.1
COLUMN_0: SW_Ab7.1 SW_AbMA.1 SW_Abmi.1 SW_Db7.1 SW_DbMA.1 SW_Dbmi.1 U1.11 | length 156.5
  Top Layer w0.457: SW_DbMA.1 SW_AbMA.1 ; SW_Dbmi.1 SW_Abmi.1 ; SW_Db7.1 SW_Ab7.1
  Bottom Layer w0.457: SW_DbMA.1 29.284,59.934 cw(c27.488,58.138) 30.028,58.138 30.028,55.732 ccw(c32.407,55.732) 30.725,54.05 31.609,53.166 cw(c29.813,51.37) 32.353,51.37 SW_Dbmi.1 32.459,40.884 cw(c30.663,39.088) 33.203,39.088 33.203,36.682 ccw(c35.582,36.682) 33.9,35 34.784,34.116 cw(c32.988,32.32) 35.528,32.32 SW_Db7.1 ; SW_AbMA.1 52.444,64.256 cw(c54.24,62.46) 54.24,65 77.712,65 cw(c77.712,62.46) 79.508,64.256 80.282,63.482 ccw(c82.078,65.278) 82.078,62.738 88.002,62.738 ccw(c88.002,64.906) 89.535,63.373 94.276,68.114 ccw(c92.48,69.91) 95.02,69.91 U1.11@95.02,76.36
COLUMN_1: SW_Bb7.1 SW_BbMA.1 SW_Bbmi.1 SW_Eb7.1 SW_EbMA.1 SW_Ebmi.1 U1.12 | length 123.7
  Top Layer w0.457: SW_EbMA.1 SW_BbMA.1 ; SW_Ebmi.1 SW_Bbmi.1 ; SW_Eb7.1 SW_Bb7.1
  Bottom Layer w0.457: SW_EbMA.1 67.384,59.934 cw(c65.588,58.138) 68.128,58.138 68.128,55.732 ccw(c70.507,55.732) 68.825,54.05 69.709,53.166 cw(c67.913,51.37) 70.453,51.37 SW_Ebmi.1 70.559,40.884 cw(c68.763,39.088) 71.303,39.088 71.303,36.682 ccw(c73.682,36.682) 72,35 72.884,34.116 cw(c71.088,32.32) 73.628,32.32 SW_Eb7.1 ; SW_BbMA.1 95.02,60.04 ccw(c95.02,62.58) 97.56,62.58 U1.12@97.56,76.36
COLUMN_2: SW_C7.1 SW_CMA.1 SW_Cmi.1 SW_F7.1 SW_FMA.1 SW_Fmi.1 U1.14 | length 115.1
  Top Layer w0.457: SW_FMA.1 SW_CMA.1 ; SW_Fmi.1 SW_Cmi.1 ; SW_F7.1 SW_C7.1
  Bottom Layer w0.457: U1.14@102.64,76.36 102.64,65.61 ccw(c103.75,65.61) 103.75,64.5 cw(c103.75,62.872) 105.378,62.872 SW_FMA.1 105.484,59.934 cw(c103.688,58.138) 106.228,58.138 106.228,55.732 ccw(c108.607,55.732) 106.925,54.05 107.809,53.166 cw(c106.013,51.37) 108.553,51.37 SW_Fmi.1 108.659,40.884 cw(c106.863,39.088) 109.403,39.088 109.403,36.682 ccw(c111.782,36.682) 110.1,35 110.984,34.116 cw(c109.188,32.32) 111.728,32.32 SW_F7.1
COLUMN_3: SW_D7.1 SW_DMA.1 SW_Dmi.1 SW_G7.1 SW_GMA.1 SW_Gmi.1 U1.15 | length 149.7
  Top Layer w0.457: SW_GMA.1 SW_DMA.1 ; SW_Gmi.1 SW_Dmi.1 ; SW_G7.1 SW_D7.1
  Bottom Layer w0.457: U1.15@105.18,76.36 105.18,68.79 ccw(c107.72,68.79) 107.72,66.25 140.938,66.25 cw(c140.938,63.71) 143.478,63.71 SW_GMA.1 143.584,59.934 cw(c141.788,58.138) 144.328,58.138 144.328,55.732 ccw(c146.707,55.732) 145.025,54.05 145.909,53.166 cw(c144.113,51.37) 146.653,51.37 SW_Gmi.1 146.759,40.884 cw(c144.963,39.088) 147.503,39.088 147.503,36.682 ccw(c149.882,36.682) 148.2,35 149.084,34.116 cw(c147.288,32.32) 149.828,32.32 SW_G7.1
COLUMN_4: SW_A7.1 SW_AMA.1 SW_Ami.1 SW_E7.1 SW_EMA.1 SW_Emi.1 U1.16 | length 185.2
  Top Layer w0.457: SW_AMA.1 SW_EMA.1 ; SW_Ami.1 SW_Emi.1 ; SW_A7.1 SW_E7.1
  Bottom Layer w0.457: U1.16@107.72,76.36 107.72,70.04 ccw(c110.26,70.04) 110.26,67.5 179.038,67.5 cw(c179.038,64.96) 181.578,64.96 SW_AMA.1 181.684,59.934 cw(c179.888,58.138) 182.428,58.138 182.428,55.732 ccw(c184.807,55.732) 183.125,54.05 184.009,53.166 cw(c182.213,51.37) 184.753,51.37 SW_Ami.1 184.859,40.884 cw(c183.063,39.088) 185.603,39.088 185.603,36.682 ccw(c187.982,36.682) 186.3,35 187.184,34.116 cw(c185.388,32.32) 187.928,32.32 SW_A7.1
COLUMN_5: SW_B7.1 SW_BMA.1 SW_Bmi.1 SW_Fs7.1 SW_FsMA.1 SW_Fsmi.1 U1.17 | length 220.8
  Top Layer w0.457: SW_BMA.1 SW_FsMA.1 ; SW_Bmi.1 SW_Fsmi.1 ; SW_B7.1 SW_Fs7.1
  Bottom Layer w0.457: U1.17@110.26,76.36 110.26,71.29 ccw(c112.8,71.29) 112.8,68.75 217.138,68.75 cw(c217.138,66.21) 219.678,66.21 SW_BMA.1 219.784,59.934 cw(c217.988,58.138) 220.528,58.138 220.528,55.732 ccw(c222.907,55.732) 221.225,54.05 222.109,53.166 cw(c220.313,51.37) 222.853,51.37 SW_Bmi.1 222.959,40.884 cw(c221.163,39.088) 223.703,39.088 223.703,36.682 ccw(c226.082,36.682) 224.4,35 225.284,34.116 cw(c223.488,32.32) 226.028,32.32 SW_B7.1
ENC_A: C12.2 R15.2 U1.31 | length 96.7
  Top Layer w0.254: C12.2 17.045,72.049 ccw(c17.82,72.049) 17.272,71.501 ccw(c18.192,72.421) 18.192,71.12 24.983,71.12 ccw(c24.983,73.66) 26.779,71.864 33.292,78.377 cw(c35.088,76.581) 35.088,79.121 91.56,79.121 ccw(c91.56,80.422) v1(92.48,79.502)
  Top Layer w0.457: R15.2 cw(c17,74.955) 17.045,74.955 C12.2
  Bottom Layer w0.635: v1(92.48,79.502) U1.31@92.48,94.14
ENC_B: C13.2 R16.2 U1.32 | length 83.2
  Top Layer w0.254: C13.2 25.593,73 ccw(c25.593,75.54) 27.389,73.744 32.784,79.139 cw(c34.58,77.343) 34.58,79.883 87.999,79.883 ccw(c87.999,82.423) 89.795,80.627 v1(89.94,80.772)
  Top Layer w0.457: C13.2 R16.2
  Bottom Layer w0.635: v1(89.94,80.772) U1.32@89.94,94.14
ENC_SW: U1.22 U4.2 | length 104.2
  Top Layer w0.381: U4.2 23.562,93.75 cw(c23.562,91.21) 25.358,93.006 36.594,81.77 ccw(c38.39,83.566) 38.39,81.026 87.213,81.026 ccw(c87.213,83.566) 89.009,81.77 95.522,88.283 cw(c97.318,86.487) 97.318,89.027 111.216,89.027 ccw(c111.216,91.567) 113.012,89.771 115.062,91.821 ccw(c114.391,92.492) 115.34,92.492 115.34,94.14 U1.22@115.34,95.156
GND: C2.1 C4.1 C5.1 C6.1 C7.1 C8.1 C9.1 C10.1 C11.1 C12.1 C13.1 J1.1 J1.2 J1.3 J1.4 J1.A1 J1.A12 J1.B1 J1.B12 J2.1 J3.1 J4.1 J5.1 J6.5 J7.5 JP1.1 JP4.1 pad.0 R1.1 R2.1 R9.1 R11.1 U1.3 U1.8 U1.13 U1.18 U1.23 U1.28 U1.33 U1.38 U1.TP1 U2.5 U2.6 U2.7 U2.8 U3.2 U4.1 U4.C U5.2 | length 17.8
  Top Layer w0.254: v1(18.955,72) C12.1 ; v1(23.045,72) C13.1 ; U5.2 v1(34.036,93.345) ; JP1.1 v1(47,102) ; JP4.1@52,102 v1(53,102) ; C7.1 v1(58.5,100.795) ; v1(62,100.795) C5.1 ; C6.1 v1(66,100.795) ; v1(77.84,98) C8.1 ; C9.1 v1(77.84,102) ; C10.1 v1(145,82) ; v1(148,86.955) C11.1 ; v1(162,82.045) R9.1 ; v1(165,82.045) C2.1 ; v1(182,82) R11.1 ; v1(185,82) C4.1
  Top Layer w0.33: v1(146,82) U3.2
  other v1: 33.289,93.345
I2C0_SCL: R12.1 U1.27 U2.3 | length 62.1
  Top Layer w0.457: R12.1 cw(c52.031,94.205) 50.595,95.641 U2.3 51.755,97.505 cw(c53.25,97.505) 53.25,99 55,99 cw(c55,97) 57,97 57,94.25 ccw(c59.25,94.25) 59.25,92 100.5,92 ccw(c100.5,94.14) U1.27@102.64,94.14
I2C0_SDA: R13.1 U1.26 U2.4 | length 61.9
  Top Layer w0.457: R13.1 cw(c54.514,94.205) 53.09,95.629 U2.4 54.279,93.04 ccw(c56.819,93.04) 56.819,90.5 102.64,90.5 ccw(c102.64,93.04) 105.18,93.04 U1.26@105.18,94.14
I2C1_SCL: J6.3 J7.3 U1.25 | length 102.2
  Top Layer w0.635: J6.3 204.394,82.133 ccw(c204.565,82.133) J7.3
  Bottom Layer w0.635: U1.25@107.72,94.14 127.075,74.785 ccw(c128.871,76.581) 128.871,74.041 196.85,74.041
I2C1_SDA: J6.2 J7.2 U1.24 | length 99.2
  Top Layer w0.635: J6.2 205.644,85.913 ccw(c207.706,85.913) 206.248,84.455 cw(c204.471,82.678) 206.984,82.678 J7.2
  Bottom Layer w0.635: U1.24@110.26,94.14 127.837,76.563 ccw(c129.633,78.359) 129.633,75.819 196.85,75.819
MIDI_RX: U1.2
MIDI_TX: U1.1 U3.3 | length 79.2
  Top Layer w0.356: U1.1@69.62,76.36 70.875,77.615 cw(c72.671,75.819) 72.671,78.359 141.442,78.359 ccw(c141.442,80.899) 143.238,79.103 144.741,80.606 cw(c146.537,78.81) 146.537,81.35 U3.3
NetC1_1: C1.1 C2.2 R8.2 R9.2 | length 7.2
  Top Layer w0.457: R8.2 R9.2 C2.2 C1.1
NetC1_2: C1.2 J2.2 | length 8.6
  Top Layer w0.457: C1.2 166,91.08 cw(c168.54,91.08) 168.54,93.62 J2.2
NetC3_1: C3.1 C4.2 R10.2 R11.2 | length 7.3
  Top Layer w0.457: R10.2 R11.2 C4.2 C3.1
NetC3_2: C3.2 J3.2 | length 8.6
  Top Layer w0.457: C3.2 186,91.08 cw(c188.54,91.08) 188.54,93.62 J3.2
NetC7_2: C7.2 FB1.2 JP2.1 | length 11.6
  Top Layer w0.635: JP2.1 cw(c50.632,102) 50.632,103.632 52.749,103.632 cw(c52.749,101.898) 53.975,103.124 ccw(c54.987,104.136) 54.987,102.705 C7.2 59.281,102.705 cw(c59.281,102.616) FB1.2
NetD1_2: D1.2 SW_DbMA.2 | length 7.3
  Top Layer w0.508: SW_DbMA.2 37.912,62.58 cw(c37.912,60.518) 39.37,61.976 ccw(c40.263,62.869) 40.263,61.606 D1.2
NetD2_2: D2.2 SW_AbMA.2 | length 7.3
  Top Layer w0.508: SW_AbMA.2 56.962,62.58 cw(c56.962,60.518) 58.42,61.976 ccw(c59.313,62.869) 59.313,61.606 D2.2
NetD3_2: D3.2 SW_EbMA.2 | length 7.3
  Top Layer w0.508: SW_EbMA.2 76.012,62.58 cw(c76.012,60.518) 77.47,61.976 ccw(c78.363,62.869) 78.363,61.606 D3.2
NetD4_2: D4.2 SW_BbMA.2 | length 7.3
  Top Layer w0.508: SW_BbMA.2 95.062,62.58 cw(c95.062,60.518) 96.52,61.976 ccw(c97.413,62.869) 97.413,61.606 D4.2
NetD5_2: D5.2 SW_FMA.2 | length 7.3
  Top Layer w0.508: SW_FMA.2 114.112,62.58 cw(c114.112,60.518) 115.57,61.976 ccw(c116.463,62.869) 116.463,61.606 D5.2
NetD6_2: D6.2 SW_CMA.2 | length 7.3
  Top Layer w0.508: SW_CMA.2 133.162,62.58 cw(c133.162,60.518) 134.62,61.976 ccw(c135.513,62.869) 135.513,61.606 D6.2
NetD7_2: D7.2 SW_Dbmi.2 | length 7.3
  Top Layer w0.508: SW_Dbmi.2 41.087,43.53 cw(c41.087,41.468) 42.545,42.926 ccw(c43.438,43.819) 43.438,42.556 D7.2
NetD8_2: D8.2 SW_Abmi.2 | length 7.3
  Top Layer w0.508: SW_Abmi.2 60.137,43.53 cw(c60.137,41.468) 61.595,42.926 ccw(c62.488,43.819) 62.488,42.556 D8.2
NetD9_2: D9.2 SW_Ebmi.2 | length 7.3
  Top Layer w0.508: SW_Ebmi.2 79.187,43.53 cw(c79.187,41.468) 80.645,42.926 ccw(c81.538,43.819) 81.538,42.556 D9.2
NetD10_2: D10.2 SW_Bbmi.2 | length 7.3
  Top Layer w0.508: SW_Bbmi.2 98.237,43.53 cw(c98.237,41.468) 99.695,42.926 ccw(c100.588,43.819) 100.588,42.556 D10.2
NetD11_2: D11.2 SW_Fmi.2 | length 7.3
  Top Layer w0.508: SW_Fmi.2 117.287,43.53 cw(c117.287,41.468) 118.745,42.926 ccw(c119.638,43.819) 119.638,42.556 D11.2
NetD12_2: D12.2 SW_Cmi.2 | length 7.3
  Top Layer w0.508: SW_Cmi.2 136.337,43.53 cw(c136.337,41.468) 137.795,42.926 ccw(c138.688,43.819) 138.688,42.556 D12.2
NetD13_2: D13.2 SW_Db7.2 | length 7.3
  Top Layer w0.508: SW_Db7.2 44.262,24.48 cw(c44.262,22.418) 45.72,23.876 ccw(c46.613,24.769) 46.613,23.506 D13.2
NetD14_2: D14.2 SW_Ab7.2 | length 7.3
  Top Layer w0.508: SW_Ab7.2 63.312,24.48 cw(c63.312,22.418) 64.77,23.876 ccw(c65.663,24.769) 65.663,23.506 D14.2
NetD15_2: D15.2 SW_Eb7.2 | length 7.3
  Top Layer w0.508: SW_Eb7.2 82.362,24.48 cw(c82.362,22.418) 83.82,23.876 ccw(c84.713,24.769) 84.713,23.506 D15.2
NetD16_2: D16.2 SW_Bb7.2 | length 7.3
  Top Layer w0.508: SW_Bb7.2 101.412,24.48 cw(c101.412,22.418) 102.87,23.876 ccw(c103.763,24.769) 103.763,23.506 D16.2
NetD17_2: D17.2 SW_F7.2 | length 7.3
  Top Layer w0.508: SW_F7.2 120.462,24.48 cw(c120.462,22.418) 121.92,23.876 ccw(c122.813,24.769) 122.813,23.506 D17.2
NetD18_2: D18.2 SW_C7.2 | length 7.3
  Top Layer w0.508: SW_C7.2 139.512,24.48 cw(c139.512,22.418) 140.97,23.876 ccw(c141.863,24.769) 141.863,23.506 D18.2
NetD19_2: D19.2 SW_GMA.2 | length 7.3
  Top Layer w0.508: SW_GMA.2 152.212,62.58 cw(c152.212,60.518) 153.67,61.976 ccw(c154.563,62.869) 154.563,61.606 D19.2
NetD20_2: D20.2 SW_DMA.2 | length 7.3
  Top Layer w0.508: SW_DMA.2 171.262,62.58 cw(c171.262,60.518) 172.72,61.976 ccw(c173.613,62.869) 173.613,61.606 D20.2
NetD21_2: D21.2 SW_AMA.2 | length 7.3
  Top Layer w0.508: SW_AMA.2 190.312,62.58 cw(c190.312,60.518) 191.77,61.976 ccw(c192.663,62.869) 192.663,61.606 D21.2
NetD22_2: D22.2 SW_EMA.2 | length 7.3
  Top Layer w0.508: SW_EMA.2 209.362,62.58 cw(c209.362,60.518) 210.82,61.976 ccw(c211.713,62.869) 211.713,61.606 D22.2
NetD23_2: D23.2 SW_BMA.2 | length 7.3
  Top Layer w0.508: SW_BMA.2 228.412,62.58 cw(c228.412,60.518) 229.87,61.976 ccw(c230.763,62.869) 230.763,61.606 D23.2
NetD24_2: D24.2 SW_FsMA.2 | length 7.3
  Top Layer w0.508: SW_FsMA.2 247.462,62.58 cw(c247.462,60.518) 248.92,61.976 ccw(c249.813,62.869) 249.813,61.606 D24.2
NetD25_2: D25.2 SW_Gmi.2 | length 7.3
  Top Layer w0.508: SW_Gmi.2 155.387,43.53 cw(c155.387,41.468) 156.845,42.926 ccw(c157.738,43.819) 157.738,42.556 D25.2
NetD26_2: D26.2 SW_Dmi.2 | length 7.3
  Top Layer w0.508: SW_Dmi.2 174.437,43.53 cw(c174.437,41.468) 175.895,42.926 ccw(c176.788,43.819) 176.788,42.556 D26.2
NetD27_2: D27.2 SW_Ami.2 | length 7.3
  Top Layer w0.508: SW_Ami.2 193.487,43.53 cw(c193.487,41.468) 194.945,42.926 ccw(c195.838,43.819) 195.838,42.556 D27.2
NetD28_2: D28.2 SW_Emi.2 | length 7.3
  Top Layer w0.508: SW_Emi.2 212.537,43.53 cw(c212.537,41.468) 213.995,42.926 ccw(c214.888,43.819) 214.888,42.556 D28.2
NetD29_2: D29.2 SW_Bmi.2 | length 7.3
  Top Layer w0.508: SW_Bmi.2 231.587,43.53 cw(c231.587,41.468) 233.045,42.926 ccw(c233.938,43.819) 233.938,42.556 D29.2
NetD30_2: D30.2 SW_Fsmi.2 | length 7.3
  Top Layer w0.508: SW_Fsmi.2 250.637,43.53 cw(c250.637,41.468) 252.095,42.926 ccw(c252.988,43.819) 252.988,42.556 D30.2
NetD31_2: D31.2 SW_G7.2 | length 7.3
  Top Layer w0.508: SW_G7.2 158.562,24.48 cw(c158.562,22.418) 160.02,23.876 ccw(c160.913,24.769) 160.913,23.506 D31.2
NetD32_2: D32.2 SW_D7.2 | length 7.3
  Top Layer w0.508: SW_D7.2 177.612,24.48 cw(c177.612,22.418) 179.07,23.876 ccw(c179.963,24.769) 179.963,23.506 D32.2
NetD33_2: D33.2 SW_A7.2 | length 7.3
  Top Layer w0.508: SW_A7.2 196.662,24.48 cw(c196.662,22.418) 198.12,23.876 ccw(c199.013,24.769) 199.013,23.506 D33.2
NetD34_2: D34.2 SW_E7.2 | length 7.3
  Top Layer w0.508: SW_E7.2 215.712,24.48 cw(c215.712,22.418) 217.17,23.876 ccw(c218.063,24.769) 218.063,23.506 D34.2
NetD35_2: D35.2 SW_B7.2 | length 7.3
  Top Layer w0.508: SW_B7.2 234.762,24.48 cw(c234.762,22.418) 236.22,23.876 ccw(c237.113,24.769) 237.113,23.506 D35.2
NetD36_2: D36.2 SW_Fs7.2 | length 7.3
  Top Layer w0.508: SW_Fs7.2 253.812,24.48 cw(c253.812,22.418) 255.27,23.876 ccw(c256.163,24.769) 256.163,23.506 D36.2
NetJ1_A5: J1.A5 R1.2
NetJ1_B5: J1.B5 R2.2
NetJ4_2: J4.2 R3.1 | length 6.3
  Top Layer w0.381: J4.2 136.281,93.62 cw(c136.281,93.548) R3.1
NetJ5_2: J5.2 R7.2 | length 11.6
  Top Layer w0.254: J5.2 150.46,93.62 cw(c150.46,91.08) 153,91.08 R7.2
NetJ5_3: J5.3 R6.1 | length 8
  Top Layer w0.254: R6.1 ccw(c142.035,101.955) 142.035,101.92 J5.3
NetR4_1: R4.1 R15.1 U4.A | length 4.6
  Top Layer w0.457: U4.A cw(c18.5,78.75) 19,78.75 R4.1 19,75.09 cw(c18.91,75.09) R15.1
NetR5_1: R5.1 R16.1 U4.B | length 4.5
  Top Layer w0.457: R16.1 R5.1 23.045,78.795 cw(c23.5,78.795) U4.B
NetR7_1: R7.1 U3.4 | length 4.8
  Top Layer w0.254: U3.4 149.65,81.35 150,81 152,81 ccw(c152,82) 153,82 R7.1
NetR14_1: R14.1 U3.5 | length 2.1
  Top Layer w0.254: U3.5 150.955,82 ccw(c150.955,82.045) R14.1
OLED_GND: JP1.2 JP3.2 U2.1 | length 6.5
  Top Layer w0.635: JP3.2@43,100.09 45.182,100.09 cw(c45.18,99.455) 45.587,99.943 ccw(c45.873,100.283) 45.794,99.846 cw(c45.678,99.221) 46.101,99.695 46.101,97.37 ccw(c46.705,97.37) U2.1
OLED_PWR: JP2.2 JP3.1 JP4.2 U2.2 | length 5.8
  Top Layer w0.635: JP2.2 cw(c49,99.86) 49.23,99.86 U2.2 ; 49.657,100.076 49.657,100.09 JP4.2@52,100.09
ROW_7TH_0: D13.1 D15.1 D17.1 D31.1 D33.1 D35.1 U1.4 | length 309
  Top Layer w0.508: U1.4@77.24,76.36 77.24,75.344 77.24,73.42 cw(c75.424,73.42) 76.708,72.136 74.912,70.34 cw(c73.116,72.136) 73.116,69.596 33.056,69.596 ccw(c33.056,67.056) 31.26,68.852 23.731,61.323 ccw(c25.527,59.527) 22.987,59.527 22.987,41.819 ccw(c25.527,41.819) 23.731,40.023 36.224,27.53 ccw(c38.02,29.326) 38.02,26.786 D13.1 63.221,26.786 cw(c63.221,24.246) 65.017,26.042 ccw(c66.946,27.669) 66.946,25.146 68.944,25.146 ccw(c68.944,27.669) 70.873,26.042 cw(c72.669,24.246) 72.669,26.786 D15.1 101.321,26.786 cw(c101.321,24.246) 103.117,26.042 ccw(c105.046,27.669) 105.046,25.146 107.044,25.146 ccw(c107.044,27.669) 108.973,26.042 cw(c110.769,24.246) 110.769,26.786 D17.1 139.421,26.786 cw(c139.421,24.246) 141.217,26.042 ccw(c143.146,27.669) 143.146,25.146 145.144,25.146 ccw(c145.144,27.669) 147.073,26.042 cw(c148.869,24.246) 148.869,26.786 D31.1 177.521,26.786 cw(c177.521,24.246) 179.317,26.042 ccw(c181.246,27.669) 181.246,25.146 183.244,25.146 ccw(c183.244,27.669) 185.173,26.042 cw(c186.969,24.246) 186.969,26.786 D33.1 215.621,26.786 cw(c215.621,24.246) 217.417,26.042 ccw(c219.346,27.669) 219.346,25.146 221.344,25.146 ccw(c221.344,27.669) 223.273,26.042 cw(c225.069,24.246) 225.069,26.786 D35.1
ROW_7TH_1: D14.1 D16.1 D18.1 D32.1 D34.1 D36.1 U1.5 | length 327.5
  Top Layer w0.457: U1.5@79.78,76.36 79.78,75.344 79.78,72.352 cw(c78.397,72.352) 79.375,71.374 77.325,69.324 cw(c75.529,71.12) 75.529,68.58 33.691,68.58 ccw(c33.691,66.04) 31.895,67.836 25.128,61.069 ccw(c26.924,59.273) 24.384,59.273 24.384,42.962 ccw(c26.924,42.962) 25.128,41.166 37.356,28.938 ccw(c39.152,30.734) 39.152,28.194 65.485,28.194 cw(c65.485,25.654) 67.281,27.45 D14.1 68.609,27.45 cw(c70.405,25.654) 70.405,28.194 103.585,28.194 cw(c103.585,25.654) 105.381,27.45 D16.1 106.709,27.45 cw(c108.505,25.654) 108.505,28.194 141.685,28.194 cw(c141.685,25.654) 143.481,27.45 D18.1 144.809,27.45 cw(c146.605,25.654) 146.605,28.194 179.785,28.194 cw(c179.785,25.654) 181.581,27.45 D32.1 182.909,27.45 cw(c184.705,25.654) 184.705,28.194 217.885,28.194 cw(c217.885,25.654) 219.681,27.45 D34.1 221.009,27.45 cw(c222.805,25.654) 222.805,28.194 255.985,28.194 cw(c255.985,25.654) 257.781,27.45 D36.1
ROW_MAJ_0: D1.1 D3.1 D5.1 D19.1 D21.1 D23.1 U1.9 | length 207.4
  Top Layer w0.508: D1.1 56.871,64.886 cw(c56.871,62.346) 58.667,64.142 ccw(c60.596,65.769) 60.596,63.246 62.594,63.246 ccw(c62.594,65.769) 64.523,64.142 cw(c66.319,62.346) 66.319,64.886 D3.1 v1(87.808,64.886) 94.971,64.886 cw(c94.971,62.346) 96.767,64.142 ccw(c98.696,65.769) 98.696,63.246 100.694,63.246 ccw(c100.694,65.769) 102.623,64.142 cw(c104.419,62.346) 104.419,64.886 D5.1 133.071,64.886 cw(c133.071,62.346) 134.867,64.142 ccw(c136.796,65.769) 136.796,63.246 138.794,63.246 ccw(c138.794,65.769) 140.723,64.142 cw(c142.519,62.346) 142.519,64.886 D19.1 171.171,64.886 cw(c171.171,62.346) 172.967,64.142 ccw(c174.896,65.769) 174.896,63.246 176.894,63.246 ccw(c176.894,65.769) 178.823,64.142 cw(c180.619,62.346) 180.619,64.886 D21.1 209.271,64.886 cw(c209.271,62.346) 211.067,64.142 ccw(c212.996,65.769) 212.996,63.246 214.994,63.246 ccw(c214.994,65.769) 216.923,64.142 cw(c218.719,62.346) 218.719,64.886 D23.1
  Bottom Layer w0.508: v1(87.808,64.886) 89.196,66.274 ccw(c87.4,68.07) 89.94,68.07 U1.9@89.94,76.36
ROW_MAJ_1: D2.1 D4.1 D6.1 D20.1 D22.1 D24.1 U1.10 | length 205.3
  Top Layer w0.457: D2.1 62.259,65.55 cw(c64.055,63.754) 64.055,66.294 92.456,66.294 ; U1.10@92.48,76.36 92.48,75.344 92.48,66.352 cw(c92.398,66.352) 92.456,66.294 ; D24.1 251.431,65.55 ccw(c249.635,63.754) 249.635,66.294 216.455,66.294 ccw(c216.455,63.754) 214.659,65.55 D22.1 213.331,65.55 ccw(c211.535,63.754) 211.535,66.294 178.355,66.294 ccw(c178.355,63.754) 176.559,65.55 D20.1 175.231,65.55 ccw(c173.435,63.754) 173.435,66.294 140.255,66.294 ccw(c140.255,63.754) 138.459,65.55 D6.1 137.131,65.55 ccw(c135.335,63.754) 135.335,66.294 102.155,66.294 ccw(c102.155,63.754) 100.359,65.55 D4.1 99.031,65.55 ccw(c97.235,63.754) 97.235,66.294 92.48,66.294 92.456,66.294
ROW_MIN_0: D7.1 D9.1 D11.1 D25.1 D27.1 D29.1 U1.6 | length 289.7
  Top Layer w0.508: U1.6@82.32,76.36 82.32,75.344 82.32,72.196 cw(c79.78,72.196) 81.576,70.4 79.357,68.181 cw(c77.561,69.977) 77.561,67.437 34.199,67.437 ccw(c34.199,64.897) 32.403,66.693 26.103,60.393 ccw(c27.187,59.309) 25.654,59.309 25.654,56.27 ccw(c27.822,56.27) 26.289,54.737 34.446,46.58 ccw(c36.242,48.376) 36.242,45.836 D7.1 60.046,45.836 cw(c60.046,43.296) 61.842,45.092 ccw(c63.771,46.719) 63.771,44.196 65.769,44.196 ccw(c65.769,46.719) 67.698,45.092 cw(c69.494,43.296) 69.494,45.836 D9.1 98.146,45.836 cw(c98.146,43.296) 99.942,45.092 ccw(c101.871,46.719) 101.871,44.196 103.869,44.196 ccw(c103.869,46.719) 105.798,45.092 cw(c107.594,43.296) 107.594,45.836 D11.1 136.246,45.836 cw(c136.246,43.296) 138.042,45.092 ccw(c139.971,46.719) 139.971,44.196 141.969,44.196 ccw(c141.969,46.719) 143.898,45.092 cw(c145.694,43.296) 145.694,45.836 D25.1 174.346,45.836 cw(c174.346,43.296) 176.142,45.092 ccw(c178.071,46.719) 178.071,44.196 180.069,44.196 ccw(c180.069,46.719) 181.998,45.092 cw(c183.794,43.296) 183.794,45.836 D27.1 212.446,45.836 cw(c212.446,43.296) 214.242,45.092 ccw(c216.171,46.719) 216.171,44.196 218.169,44.196 ccw(c218.169,46.719) 220.098,45.092 cw(c221.894,43.296) 221.894,45.836 D29.1
ROW_MIN_1: D8.1 D10.1 D12.1 D26.1 D28.1 D30.1 U1.7 | length 275.7